# Altium PCB wifi_board_v2.PcbDoc
Units mil, origin at the board's own origin, x right, y up, seen from the top; angles counter-clockwise.
Board outline 1135 x 2672.07 mil, 4 copper layers (Top Layer, GND, 3v3, Bottom Layer), stack 23.756 mil thick; 54 components, 49 nets, 266 pads, 41 vias.
Unrouted connection lines stored in the file: 2.
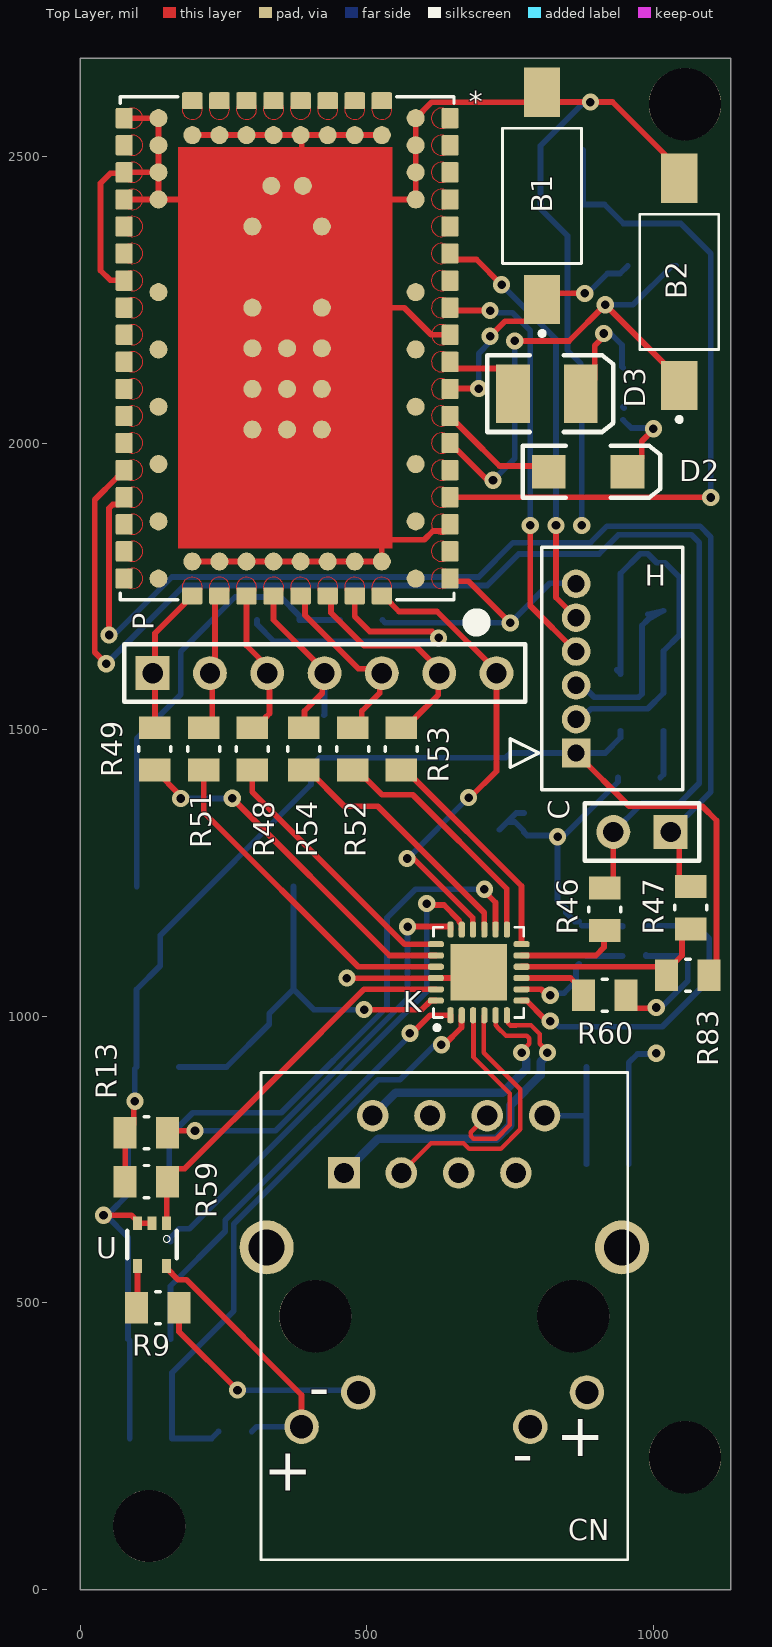
[diagram p0: Top Layer view]
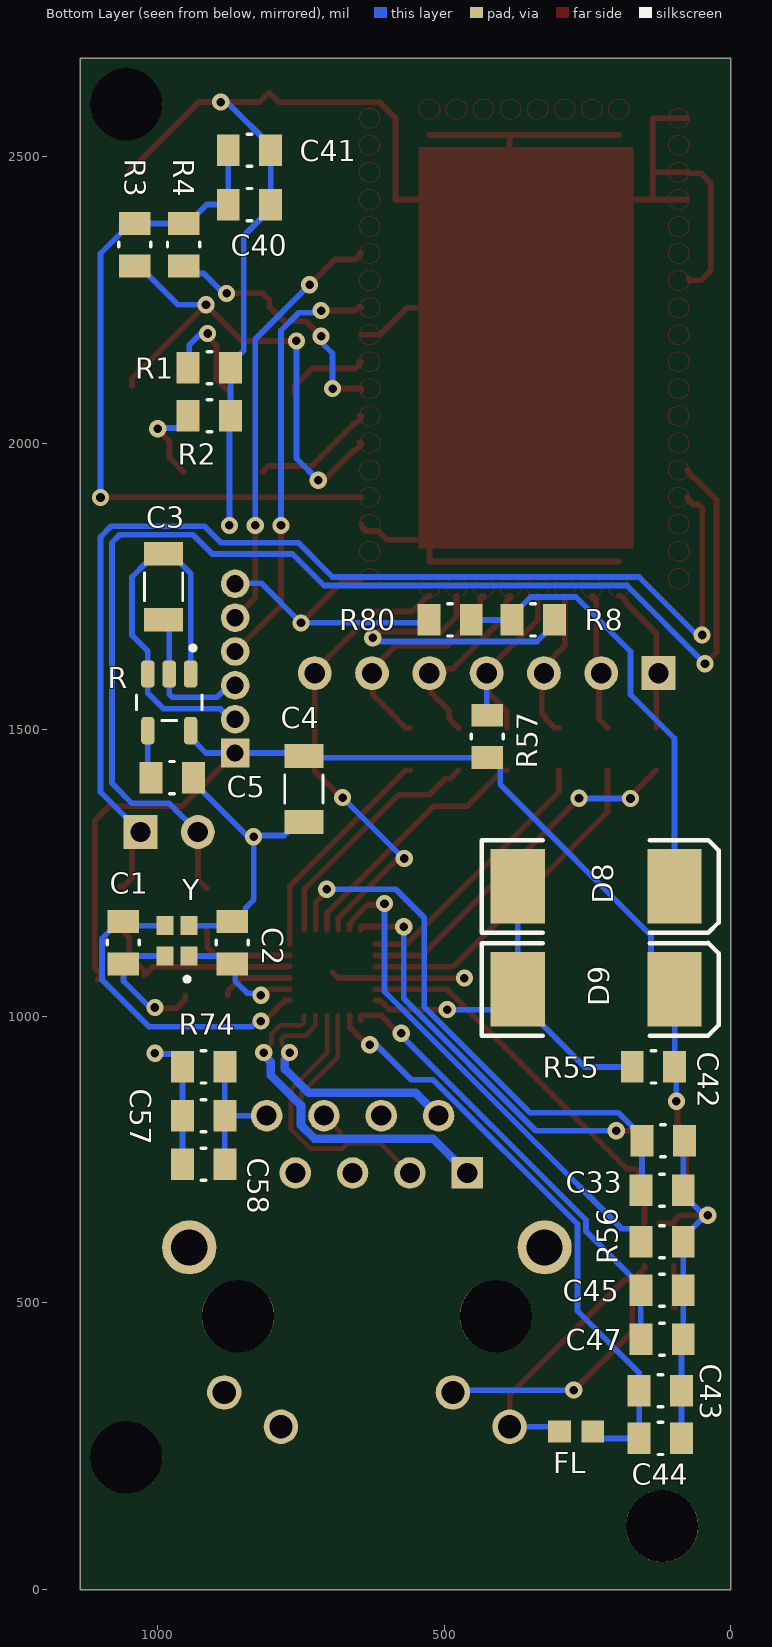
[diagram p1: Bottom Layer view, seen from below]
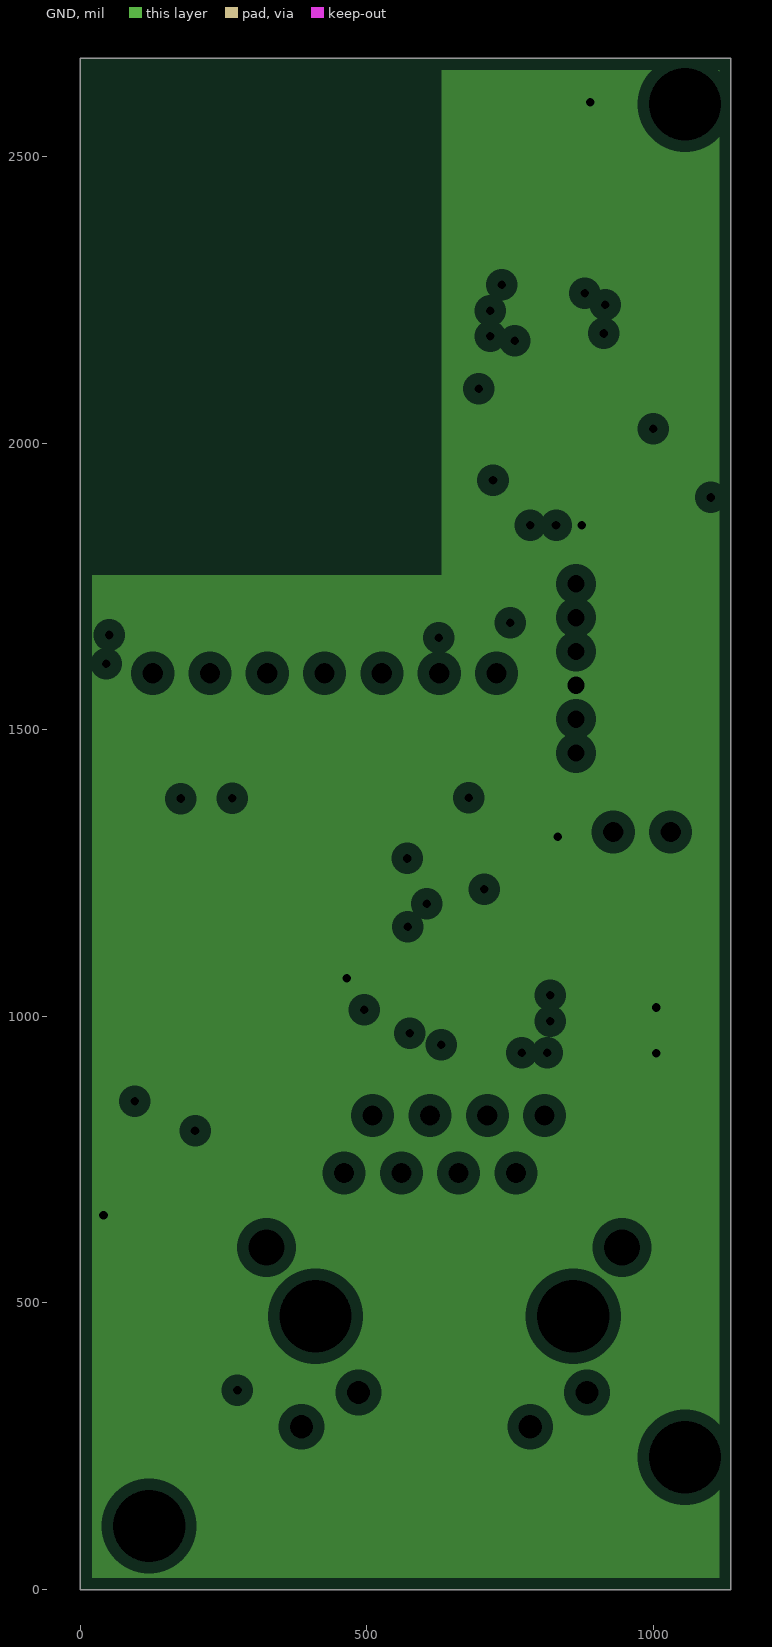
[diagram p2: GND, clearances drawn from the general rule]
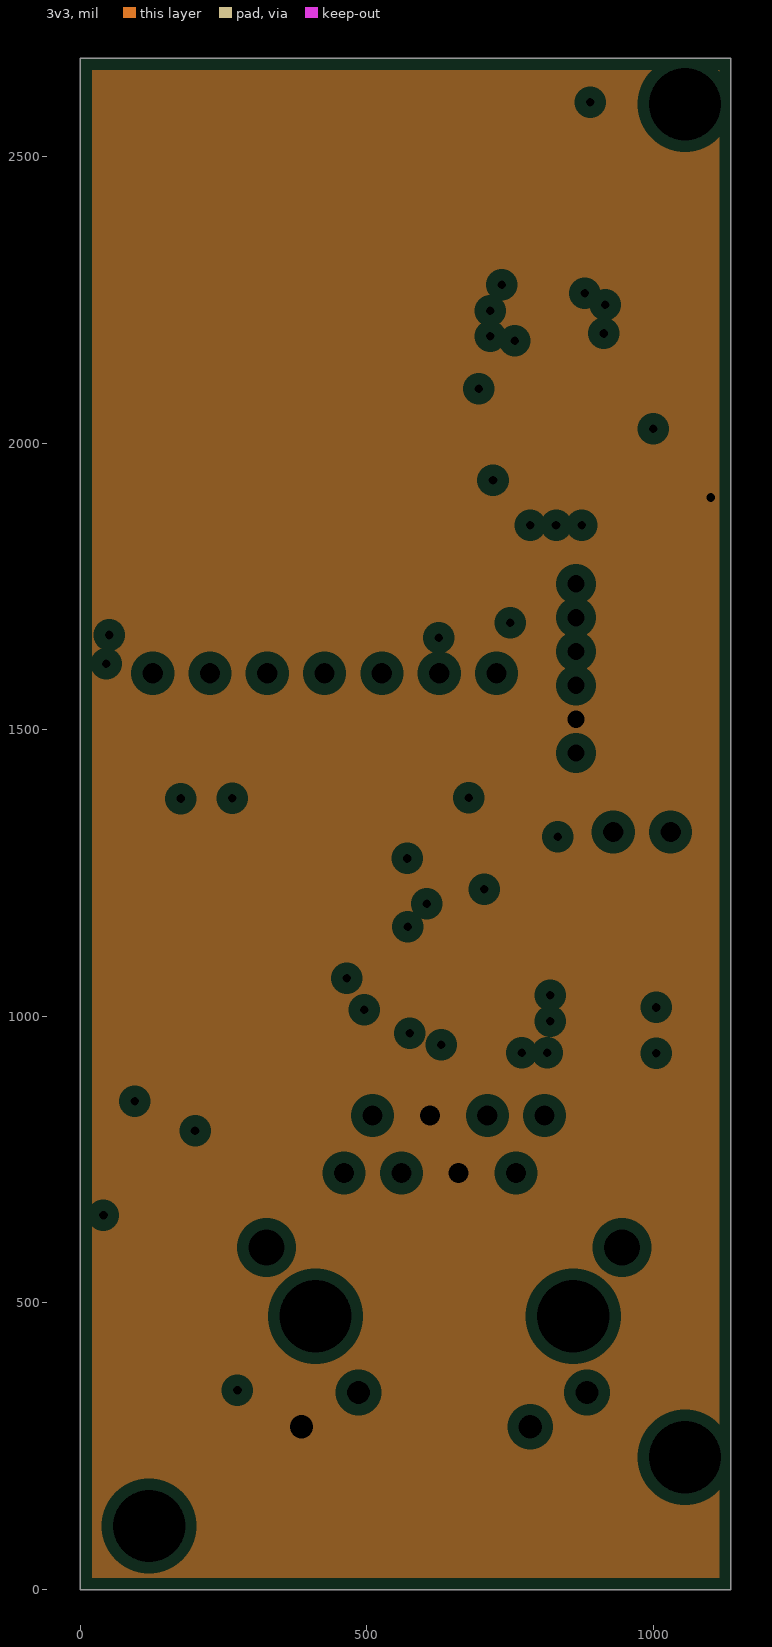
[diagram p3: 3v3, clearances drawn from the general rule]

## Layer stack, top to bottom
Top Solder: solder mask 0.4, Solder Resist, Dk 3.5
Top Layer: signal copper 1.4
Dielectric 2: prepreg 2.8, PP-006, Dk 4.1
GND: plane copper 1.378, net GND
Dielectric 1: dielectric 12.6, FR-4, Dk 4.8
3v3: plane copper 1.378, net 3v3
Dielectric 3: prepreg 2.8, PP-006, Dk 4.1
Bottom Layer: signal copper 1.4
Bottom Solder: solder mask 0.4, Solder Resist, Dk 3.5

## Board outline
0,2671.21 0,-0.86 1135,-0.86 1135,2671.21

## Design rules (kind name [scope] priority, off if disabled: settings)
Clearance [All] p1: gap=5 ignorepadtopadclearanceinfootprint=FALSE // Default=10mil
DiffPairsRouting [All] p1: maxlimit=10 minlimit=10 mostfreqgap=10 toplayer_minwidth=8 toplayer_maxwidth=15 toplayer_prefwidth=15 bottomlayer_minwidth=10 bottomlayer_maxwidth=15 bottomlayer_prefwidth=15 maxuncoupledlength=500 // DefaultMinWidth=15mil
HoleSize [All] p1: absolutevalues=TRUE maxlimit=150 minlimit=1 maxpercent=80.000 minpercent=20.000 // MaximumDefault=100mil
MinimumSolderMaskSliver [All] p1: minsoldermaskwidth=1 // Default=10mil
PlaneClearance [All] p1: clearance=20
PlaneConnect [All] p1: planeconnectstyle=Relief reliefexpansion=20 reliefentries=4 reliefconductorwidth=10 reliefairgap=10
PolygonConnect [All] p1: connectstyle=Relief reliefconductorwidth=10 reliefentries=4 polygonreliefangle="90 Angle" airgapwidth=10
RoutingVias [All] p1: holewidth=28 width=50 viastyle="Through Hole" minholewidth=28 minwidth=50 maxholewidth=28 maxwidth=50
SilkToSolderMaskClearance [IsPad] p1: minsilkscreentomaskgap=4 clearancetoexposedcopper=TRUE // Default=10mil
SolderMaskExpansion [All] p1: expansion=4 istentingtop=FALSE
Width [All] p1: maxlimit=10 minlimit=8 preferedwidth=10 minimp=50.000000 maximp=50.000000 favimp=50.000000 // MinWidthDefault=10mil
24 further rules are at their usual default settings.

## Classes and differential pairs
differential pair PHY_TX: +PHY_TX_P -PHY_TX_N
differential pair PHY_RX: +PHY_RX_P -PHY_RX_N

## Components (designator, comment, footprint, x,y, rotation, side; value= is the part's Value field where it differs from the comment)
* "ODIN-W262" ODIN-W262 360.63,2165.35 r90 top
B1 "push button" TECO-FSMSM 805.68,2431.21 r90 top
B2 "push button" TECO-FSMSM 1045,2281.21 r90 top
C "Header 2" HDR1X2 1030,1321.21 r180 top
C1 "22uF 10V" 0805 1060,1128.21 r270 bottom value=22uF
C2 "22uF 10V" 0805 870,1128.21 r90 bottom value=22uF
C3 "10UF 25V" 1206 990,1749.24 r270 bottom value=10uF
C4 "10UF 25V" 1206 745,1396.21 r270 bottom value=10uF
C5 "10nF 50V" 0805 975,1416.21 r180 bottom value=10nF
C33 "2.2uF 16V" 0805 120,696.21 r0 bottom value=2.2uF
C40 "100nF 50V" 0805 840,2416.21 r0 bottom value=100nF
C41 "100nF 50V" 0805 840,2511.21 r0 bottom value=100nF
C42 "100nF 50V" 0805 118,782.15 r0 bottom value=100nF
C43 "2.2uF 16V" 0805 123,346.18 r0 bottom value=2.2uF
C44 "100nF 50V" 0805 123,262.9 r0 bottom value=100nF
C45 "100nF 50V" 0805 120,521.21 r0 bottom value=100nF
C47 "100nF 50V" 0805 120,436.21 r0 bottom value=100nF
C57 "100nF 50V" 0805 920,826.21 r0 bottom value=100nF
C58 "100nF 50V" 0805 920,741.21 r0 bottom value=100nF
CN "CN J00-0045NL" "RJ45 J00-0045NL" 635,476.21 r180 top
D2 "LED2" 3.2X1.6X1.1 886.1,1950 r0 top
D3 "LED3" 3.5X2.8X1.9 814.06,2086.21 r0 top
D8 "Diode" SMC 235,1226.21 r180 bottom
D9 "Diode" SMC 235,1046.71 r180 bottom
FL "BLM18PG300SN1D" BEADC1608X95N 270,275 r180 bottom
H "S6B-ZR(LF)(SN)" S6B-ZR_JST 865,1459.05 r90 top
K "KSZ8081RNAIA-TR" QFN50P400X400X90-25N 695,1076.21 r90 top
P "Header 7" HDR1X7 126.07,1598.45 r0 top
R "LP2992IM5-1.8" SOT95P280X145-5N 980,1547.5 r270 bottom
R1 "270" 0805 910,2131.21 r0 bottom
R2 "270" 0805 910,2047.94 r0 bottom
R3 "1k" 0805 1040,2346.21 r90 bottom
R4 "1k" 0805 955,2346.21 r90 bottom
R8 "JUMPER" 0805 345,1691.21 r180 bottom value=0
R9 "120" 0805 135,491.21 r180 top
R13 "1k" 0805 115,796.21 r180 top
R46 "10.0" 0805 915,1186.21 r90 top
R47 "10.0" 0805 1065,1189.21 r90 top
R48 "10.0" 0805 300,1466.21 r270 top
R49 "10.0" 0805 130,1466.21 r270 top
R51 "10.0" 0805 215,1466.21 r270 top
R52 "10.0" 0805 475,1466.21 r90 top
R53 "10.0" 0805 560,1466.21 r90 top
R54 "10.0" 0805 390,1466.21 r90 top
R55 "1k" 0805 135,911.21 r180 bottom
R56 "1k" 0805 120,606.21 r180 bottom
R57 "1k" 0805 425,1488 r90 bottom
R59 "1k" 0805 115,711.21 r0 top
R60 "6.8k" 0805 915,1036.21 r180 top
R74 "16m" 0805 920,911.21 r180 bottom
R80 "JUMPER" 0805 490,1691.21 r0 bottom value=0
R83 "4.7k" 0805 1060,1071.21 r180 top
U "NC7SZ125" SC70-5 125,601.21 r180 top
Y "ECS-250-10-37-JTN-TR" XTAL_ECS-250-10-37-JTN-TR 966.51,1131.21 r90 bottom

## Footprints (in the part's own frame and the unit in brackets; to place one, negate y for a bottom-side part, rotate by r counter-clockwise, add the part's x,y. Pads: shape width x height; smd on the part's side, far side on the other; paste and mask are expansions set on the pad)
3.2X1.6X1.1 [mm]
  rect 1.5x1.5 smd: 1(-1.75,0) 2(1.75,0)
  silkscreen extent -2.9,-1.15 3.2,1.15
3.5X2.8X1.9 [mm] "SM LED; 2 C-Bend Leads; Body 3.5 x 2.8 x 1.9 mm, inc leads (LxWxH typ)"
  rect 1.5x2.6 smd: 1(-1.5,0) 2(1.5,0)
  silkscreen extent -2.65,-1.7 2.95,1.7
0805 [mil]
  rect 40x55 smd: 1(-37,0) 2(37,0)
  silkscreen extent -4,-28 4,28
1206 [mm]
  rect 1.05x1.72 smd: 1(-1.46,0) 2(1.46,0)
  silkscreen extent -0.62,-0.85 0.62,0.85
BEADC1608X95N [mm]
  rect 1x0.97 smd: 1(-0.735,0) 2(0.735,0)
HDR1X2 [mm] "Connector; Header; 2 Position"
  rect 1.5x1.5 hole 0.9: 1(0,0)
  round 1.5 hole 0.9: 2(2.54,0)
  silkscreen extent -1.27,-1.27 3.81,1.27
HDR1X7 [mm] "Connector; Header; 7 Position"
  rect 1.5x1.5 hole 0.9: 1(0,0)
  round 1.5 hole 0.9: 2(2.54,0) 3(5.08,0) 4(7.62,0) 5(10.16,0) 6(12.7,0) 7(15.24,0)
  silkscreen extent -1.27,-1.27 16.51,1.27
ODIN-W262 [mm]
  round 0.8 smd: 1(6.6,-5.7) 2(7.8,-5.7) 3(9,-5.7) 4(10.2,-5.7) 5(9.45,-4.2) 6(9.45,-3) 7(9.45,-1.8) 8(9.45,-0.6) 9(9.45,0.6) 10(9.45,1.8) 11(9.45,3) 12(9.45,4.2) 13(10.2,5.7) 14(9,5.7) 15(7.8,5.7) 16(6.6,5.7) 17(-9.45,4.2) 18(-9.45,3) 19(-9.45,1.8) 20(-9.45,0.6) 21(-9.45,-0.6) 22(-9.45,-1.8) 23(-9.45,-3) 24(-9.45,-4.2) 25(-3.6,-1.54) 26(-1.8,-1.54) 27(0,-1.54) 28(1.8,-1.54) 29(5.4,-1.54) 30(7.2,-0.7) 31(-3.6,0) 32(-1.8,0) 33(0,0) 34(-3.6,1.54) 35(-1.8,1.54) 36(0,1.54) 37(1.8,1.54) 38(5.4,1.54) 39(7.2,0.7) TP1(2.49,-5.7) TP2(2.49,5.7) TP3(-0.05,-5.7) TP4(-0.05,5.7) TP5(-2.59,-5.7) TP6(-2.59,5.7) TP7(-5.13,-5.7) TP8(-5.13,5.7) TP9(-7.67,-5.7) TP10(-7.67,5.7) TP11(-10.21,-5.7) TP12(-10.21,5.7)
  rrect15% 0.9x0.75 smd paste-1 mask+0: A1(-10.2,-7.225) A2(-9,-7.225) A3(-7.8,-7.225) A4(-6.6,-7.225) A5(-5.4,-7.225) A6(-4.2,-7.225) A7(-3,-7.225) A8(-1.8,-7.225) A9(-0.6,-7.225) A10(0.6,-7.225) A11(1.8,-7.225) A12(3,-7.225) A13(4.2,-7.225) A14(5.4,-7.225) A15(6.6,-7.225) A16(7.8,-7.225) A17(9,-7.225) A18(10.2,-7.225) C1(10.2,7.225) C2(9,7.225) C3(7.8,7.225) C4(6.6,7.225) C5(5.4,7.225) C6(4.2,7.225) C7(3,7.225) C8(1.8,7.225) C9(0.6,7.225) C10(-0.6,7.225) C11(-1.8,7.225) C12(-3,7.225) C13(-4.2,7.225) C14(-5.4,7.225) C15(-6.6,7.225) C16(-7.8,7.225) C17(-9,7.225) C18(-10.2,7.225)
  rrect15% 0.75x0.9 smd paste-1 mask+0: B1(10.975,-4.2) B2(10.975,-3) B3(10.975,-1.8) B4(10.975,-0.6) B5(10.975,0.6) B6(10.975,1.8) B7(10.975,3) B8(10.975,4.2) D1(-10.975,4.2) D2(-10.975,3) D3(-10.975,1.8) D4(-10.975,0.6) D5(-10.975,-0.6) D6(-10.975,-1.8) D7(-10.975,-3) D8(-10.975,-4.2)
  Top Layer circle w0: c10.2,6.85 r0.45
  Top Layer circle w0: c4.2,-6.85 r0.45
  Top Layer circle w0: c3,-6.85 r0.45
  Top Layer circle w0: c5.4,-6.85 r0.45
  Top Layer circle w0: c6.6,-6.85 r0.45
  Top Layer circle w0: c7.8,-6.85 r0.45
  Top Layer circle w0: c9,-6.85 r0.45
  Top Layer circle w0: c10.2,-6.85 r0.45
  Top Layer circle w0: c-9,-6.85 r0.45
  Top Layer circle w0: c-5.4,-6.85 r0.45
  Top Layer circle w0: c1.8,6.85 r0.45
  Top Layer circle w0: c0.6,6.85 r0.45
  Top Layer circle w0: c-0.6,6.85 r0.45
  Top Layer circle w0: c-1.8,6.85 r0.45
  Top Layer circle w0: c-3,6.85 r0.45
  Top Layer circle w0: c-4.2,6.85 r0.45
  Top Layer circle w0: c-7.8,6.85 r0.45
  Top Layer circle w0: c-9,6.85 r0.45
  Top Layer circle w0: c-10.2,6.85 r0.45
  Top Layer circle w0: c9,6.85 r0.45
  Top Layer circle w0: c5.4,6.85 r0.45
  Top Layer circle w0: c4.2,6.85 r0.45
  Top Layer circle w0: c10.6,-4.2 r0.45
  Top Layer circle w0: c10.6,-3 r0.45
  Top Layer circle w0: c10.6,-1.8 r0.45
  Top Layer circle w0: c10.6,-0.6 r0.45
  Top Layer circle w0: c10.6,0.6 r0.45
  Top Layer circle w0: c10.6,1.8 r0.45
  Top Layer circle w0: c10.6,3 r0.45
  Top Layer circle w0: c10.6,4.2 r0.45
  Top Layer lines w0: -5.414,7.3 ccw(c-5.4,6.85) -5.486,7.292 ccw(c-5.4,6.85) -5.667,6.488 ccw(c-5.4,6.85) -5.4,6.4 ccw(c-5.4,6.85) -5.414,7.3 ; 2.968,7.299 cw(c3,6.85) 3.07,7.295 cw(c3,6.85) 3.131,7.281 cw(c3,6.85) 3,6.4 cw(c3,6.85) 2.968,7.299 ; 7.756,7.298 ccw(c7.8,6.85) 7.669,7.281 ccw(c7.8,6.85) 7.8,6.4 ccw(c7.8,6.85) 7.756,7.298 ; 6.53,7.295 cw(c6.6,6.85) 6.6,6.4 cw(c6.6,6.85) 6.53,7.295 ; -6.731,7.281 cw(c-6.6,6.85) -6.6,6.4 cw(c-6.6,6.85) -6.731,7.281 ; -11.031,4.331 cw(c-10.6,4.2) -10.6,3.75 cw(c-10.6,4.2) -11.045,4.13 cw(c-10.6,4.2) -11.05,4.2 cw(c-10.6,4.2) -11.05,4.207 cw(c-10.6,4.2) -11.047,4.251 cw(c-10.6,4.2) -11.045,4.27 cw(c-10.6,4.2) -11.042,4.286 cw(c-10.6,4.2) -11.031,4.331 ; -11.037,3.107 ccw(c-10.6,3) -11.045,3.07 ccw(c-10.6,3) -11.05,3 ccw(c-10.6,3) -10.6,2.55 ccw(c-10.6,3) -11.037,3.107 ; -11.05,1.8 ccw(c-10.6,1.8) -10.6,1.35 ccw(c-10.6,1.8) -11.05,1.8 ; -11.047,0.651 ccw(c-10.6,0.6) -11.05,0.6 ccw(c-10.6,0.6) -11.031,0.469 ccw(c-10.6,0.6) -10.6,0.15 ccw(c-10.6,0.6) -11.047,0.651 ; -11.05,-0.6 cw(c-10.6,-0.6) -10.6,-1.05 cw(c-10.6,-0.6) -11.031,-0.731 cw(c-10.6,-0.6) -11.05,-0.619 cw(c-10.6,-0.6) -11.05,-0.6 ; -11.048,-1.762 ccw(c-10.6,-1.8) -11.05,-1.8 ccw(c-10.6,-1.8) -11.045,-1.87 ccw(c-10.6,-1.8) -11.039,-1.901 ccw(c-10.6,-1.8) -11.031,-1.931 ccw(c-10.6,-1.8) -10.6,-2.25 ccw(c-10.6,-1.8) -11.048,-1.762 ; -11.031,-2.869 cw(c-10.6,-3) -10.6,-3.45 cw(c-10.6,-3) -11.031,-3.131 cw(c-10.6,-3) -11.034,-3.118 cw(c-10.6,-3) -11.042,-3.086 cw(c-10.6,-3) -11.043,-3.076 cw(c-10.6,-3) -11.049,-3.032 cw(c-10.6,-3) -11.05,-3 cw(c-10.6,-3) -11.031,-2.869 ; -11.05,-4.2 cw(c-10.6,-4.2) -10.6,-4.65 cw(c-10.6,-4.2) -10.975,-4.449 cw(c-10.6,-4.2) -11.031,-4.331 cw(c-10.6,-4.2) -11.05,-4.2 ; 0.6,-6.4 cw(c0.6,-6.85) 0.6,-7.3 cw(c0.6,-6.85) 0.6,-6.4 ; -8.067,-6.488 ccw(c-7.8,-6.85) -8.098,-6.513 ccw(c-7.8,-6.85) -7.8,-7.3 ccw(c-7.8,-6.85) -8.067,-6.488 ; -10.069,-7.281 cw(c-10.2,-6.85) -10.114,-7.292 cw(c-10.2,-6.85) -10.2,-7.3 cw(c-10.2,-6.85) -10.27,-7.295 cw(c-10.2,-6.85) -10.069,-7.281 ; -3.131,-7.281 ccw(c-3,-6.85) -3,-7.3 ccw(c-3,-6.85) -3.131,-7.281 ; -0.514,-7.292 ccw(c-0.6,-6.85) -0.67,-7.295 ccw(c-0.6,-6.85) -0.6,-7.3 ccw(c-0.6,-6.85) -0.514,-7.292 ; -6.67,-7.295 cw(c-6.6,-6.85) -6.6,-7.3 cw(c-6.6,-6.85) -6.67,-7.295 ; -1.87,-7.295 ccw(c-1.8,-6.85) -1.8,-7.3 ccw(c-1.8,-6.85) -1.787,-7.3 ccw(c-1.8,-6.85) -1.87,-7.295 ; 1.87,-7.295 cw(c1.8,-6.85) 1.849,-7.297 cw(c1.8,-6.85) 1.8,-7.3 cw(c1.8,-6.85) 1.87,-7.295 ; -4.169,-7.299 cw(c-4.2,-6.85) -4.2,-7.3 cw(c-4.2,-6.85) -4.169,-7.299
  silkscreen extent -12.4,-8.65 11.15,7.4, body extent -11.15,-7.4 11.15,7.4, height 4.8
QFN50P400X400X90-25N [mm]
  rrect70% 0.71x0.27 smd: 1(-1.9,1.25) 2(-1.9,0.75) 3(-1.9,0.25) 4(-1.9,-0.25) 5(-1.9,-0.75) 6(-1.9,-1.25) 13(1.9,-1.25) 14(1.9,-0.75) 15(1.9,-0.25) 16(1.9,0.25) 17(1.9,0.75) 18(1.9,1.25)
  rrect70% 0.27x0.71 smd: 7(-1.25,-1.9) 8(-0.75,-1.9) 9(-0.25,-1.9) 10(0.25,-1.9) 11(0.75,-1.9) 12(1.25,-1.9) 19(1.25,1.9) 20(0.75,1.9) 21(0.25,1.9) 22(-0.25,1.9) 23(-0.75,1.9) 24(-1.25,1.9)
  rect 2.5x2.5 smd paste-2: 25(0,0)
  silkscreen extent -2.55,-2 2,2
"RJ45 J00-0045NL" [mm]
  rect 1.398x1.398 hole 0.89: 1(4.445,-6.35)
  round 1.398 hole 0.89: 2(3.175,-8.89) 3(1.905,-6.35) 4(0.635,-8.89) 5(-0.635,-6.35) 6(-1.905,-8.89) 7(-3.175,-6.35) 8(-4.445,-8.89)
  round 1.53 hole 1.02: 9(6.325,4.9) 10(3.81,3.38) 11(-3.81,4.9) 12(-6.325,3.38)
  round 3.2 hole 3.2 unplated: None(-5.715,0) None(5.715,0)
  round 2.4 hole 1.6: S1(-7.875,-3.05) S2(7.875,-3.05)
  silkscreen extent -8.13,-10.8 8.13,10.8
S6B-ZR_JST [mil]
  rect 50x50 hole 30 mask+0: 1(0,0)
  round 50 hole 30 mask+0: 2(59.06,0) 3(118.11,0) 4(177.17,0) 5(236.22,0) 6(295.28,0)
  silkscreen extent -64,-186 359,115, body extent 0,0 10,10, height 10
SC70-5 [mm]
  rect 0.4x0.6 smd: 1(-0.65,-0.95) 2(0,-0.95) 3(0.65,-0.95) 4(0.65,0.95) 5(-0.65,0.95)
  silkscreen extent -1.1,-0.6 1.1,0.6
SMC [mm] "DO-214-AB/SMC; 2 C-Bend Leads; Body 7.9 x 5.9 mm, inc. leads (LxW)"
  rect 2.4x3.3 smd: 1(-3.475,0) 2(3.475,0)
  silkscreen extent -5.07,-2.05 5.43,2.05
SOT95P280X145-5N [mm]
  rrect50% 1.21x0.59 smd: 1(-1.255,0.95) 2(-1.255,0) 3(-1.255,-0.95) 4(1.255,-0.95) 5(1.255,0.95)
  silkscreen extent -2.51,-1.45 0.8,1.45
TECO-FSMSM [mm]
  rect 2.19x1.6 smd: 1(-4.59,0) 2(4.59,0)
  silkscreen extent -6.2,-1.75 3,1.75
XTAL_ECS-250-10-37-JTN-TR [mm]
  rect 0.85x0.75 smd: 1(-0.675,-0.525) 2(0.675,-0.525) 3(0.675,0.525) 4(-0.675,0.525)
  silkscreen extent -1.8,-0.55 -1.6,-0.35

## Part data
B1 B2: library part Teco-FSMSM
C: "Header, 2-Pin", LatestRevisionDate=17-Jul-2002, LatestRevisionNote="Re-released for DXP Platform.", Publisher="Altium Limited"
C1 C2: library part "CAP 22uF 10V", "CAP CER 2.2UF 10V X5R 0805", Operating Temperature="-55°C ~ 85°C", Package=0805, Rating=10V, Temperature Coefficient=X5R, Tolerance=20%
C3 C4: library part "CAP 10uF 25V", "CAP CER 10UF 25V X5R 1206", Operating Temperature="-55°C ~ 85°C", Package=1206, Rating=25V, Temperature Coefficient=X5R, Tolerance=10%
C5: library part "CAP 10nF 50V", "CAP CER 10000PF 50V X7R 0805", Operating Temperature="-55°C ~ 125°C", Package=0805, Rating=50V, Temperature Coefficient=X7R, Tolerance=10%
C33 C43: library part "CAP 2.2uF 16V", "CAP CER 2.2UF 16V X7R 0805", Operating Temperature="-55°C ~ 125°C", Package=0805, Rating=16V, Temperature Coefficient=X7R, Tolerance=10%
C40 C41 C42 C44 C45 C47 C57 C58: library part "CAP 100nF 50V", "CAP CER 0.1UF 50V X7R 0805", Package=0805, Rating=50V, Tolerance=10%
CN: library part "CN MAGJACK", "CN MAGJACK 1PORT 100 BASE-TX", Package=None, Supplier Part Number 1=673-J00-0045NL, Digikey=553-1619-5-ND, Digikey Link=https://www.digikey.com/product-detail/en/pulse-electronics-network/J00-0045NL/553-1619-5-ND/1036860?utm_source=snapeda&utm_medium=aggregator&utm_campaign=symbol, MF="Pulse Electronics", MP=J00-0045NL, SnapEDA_Link=https://www.snapeda.com/parts/J00-0045NL/Pulse%20Electronics%20Network/view-part/87956/?ref=snap, Supplier 1=Mouser
D2: library part "LED RED SMD", "Typical RED, GREEN, YELLOW, AMBER GaAs LED", Color=Red, Current - Test=20mA, Lens Color=Colorless, Package=1206, Voltage - Forward (Vf) (Typ)=1.7V, Lens Transparency=Clear
D3: "Typical BLUE SiC LED", DatasheetVersion=16-Apr-2002, LatestRevisionDate=17-Dec-2003, LatestRevisionNote="PCB Footprint replaced.", PackageDescription="SM LED; 2 C-Bend Leads; Body 3.5 x 2.8 x 1.9 mm, inc leads (LxWxH typ)", PackageReference=3.5X2.8X1.9, PackageVersion=16-Apr-2002, Published=8-Jun-2000, Publisher="Altium Limited"
D8 D9: "Default Diode", Code_JEDEC=DO-214-AB, LatestRevisionDate=17-Jul-2002, LatestRevisionNote="Re-released for DXP Platform.", PackageDescription="DO-214-AB/SMC; 2 C-Bend Leads; Body 7.9 x 5.9 mm, inc. leads (LxW)", PackageReference=SMC, PackageVersion=Sep-1996, Published=8-Jun-2000, Publisher="Altium Limited"
FL: "30 Ohms @ 100MHz 1 Power Line Ferrite Bead 0603 _1608 Metric_ 1A 50mOhm", Package="1608 Murata", Availability=Unavailable, MF=Murata, MP=BLM18PG300SN1D, Price=None, SnapEDA_Link=https://www.snapeda.com/parts/BLM18PG300SN1D/Murata/view-part/270173/?ref=snap
H: "No Description Available", Built_By=EMA_UL_Team, Copyright="Copyright (C) 2018 Accelerated Designs. All rights reserved", Manufacturer_Part_Number=S6B-ZR(LF)(SN), RefDes=RefDes, SourceLibrary=JST_2017-04-18, Type=DEV, Vendor=JST
K: "1/1 Transceiver Full RMII 24-QFN _4x4_", Package="QFN-24 Microchip", Availability=Unavailable, MF=Microchip, MP=KSZ8081RNAIA-TR, Price=None, SnapEDA_Link=https://www.snapeda.com/parts/KSZ8081RNAIA-TR/Microchip/view-part/482545/?ref=snap
P: "Header, 7-Pin", LatestRevisionDate=17-Jul-2002, LatestRevisionNote="Re-released for DXP Platform.", Publisher="Altium Limited"
R: Package=None, Availability=Unavailable, MP=LP2992IM5-1.8/NOPB, Price=None
R1 R2: library part "RES 270 1/8W", "RES SMD 270 OHM 5% 1/8W 0805", Package=0805, Power (Watts)=0.125W, Tolerance=5%
R3 R4 R13 R55 R56 R57 R59: library part "RES 1k 1/8W", "RES SMD 1K OHM 5% 1/8W 0805", Package=0805, Power (Watts)=0.125W, Tolerance=5%
R8 R80: library part "RES 0 JUMPER", "RES SMD 0 OHM JUMPER GENERIC 0805", Package=0805
R9: library part "RES 120.0 1/8W", "RES SMD 120 OHM 5% 1/8W 0805", Package=0805, Power (Watts)=0.125W, Tolerance=5%
R46 R47 R48 R49 R51 R52 R53 R54: library part "RES 10.0 1/8W - 5%", "RES SMD 10.0 OHM 5% 1/8W 0805", Package=0805, Power (Watts)=0.125W, Tolerance=5%
R60: library part "RES 6.8k 1/8W", "RES SMD 6.8K OHM 5% 1/8W 0805", Package=0805, Power (Watts)=0.125W, Tolerance=5%
R74: library part "RES 16m 1/2W", "RES SMD 0.016 OHM 1% 1/2W 0805 Thick Film", Case Code (Imperial)=0805, Case Code (Metric)=2012, Manufacturer=Panasonic, Manufacturer Part Number=ERJ-6BWFR016V, Max Operating Temperature=155°C, Max Power Dissipation=500mW, Min Operating Temperature=-55°C, Package Quantity=1, Resistance=16mR, Supplier Part Number 1=P.016AQCT-ND, Temperature Coefficient=200ppm/°C, Tolerance=1%, Case/Package=0805, Category="Chip SMD Resistors", ComponentLink1Description=https://datasheet.ciiva.com/11808/0900766b8126441d-11808690.pdf?src-supplier=RSComponents, ComponentLink1URL=https://datasheet.ciiva.com/11808/0900766b8126441d-11808690.pdf?src-supplier=RSComponents, ComponentLink2Description=https://datasheet.ciiva.com/2452/aoa0000ce3-2452594.pdf?src-supplier=Digi-Key, ComponentLink2URL=https://datasheet.ciiva.com/2452/aoa0000ce3-2452594.pdf?src-supplier=Digi-Key, ComponentLink3Description=https://datasheet.ciiva.com/2452/aoa0000ce3-2452592.pdf?src-supplier=Digi-Key, ComponentLink3URL=https://datasheet.ciiva.com/2452/aoa0000ce3-2452592.pdf?src-supplier=Digi-Key, ComponentLink4Description=https://datasheet.ciiva.com/2452/aoa0000ce3-2452593.pdf?src-supplier=Digi-Key, ComponentLink4URL=https://datasheet.ciiva.com/2452/aoa0000ce3-2452593.pdf?src-supplier=Digi-Key, ComponentLink5Description=https://datasheet.ciiva.com/9192/aoa0000ce3-9192761.pdf?src-supplier=Avnet, ComponentLink5URL=https://datasheet.ciiva.com/9192/aoa0000ce3-9192761.pdf?src-supplier=Avnet, ComponentLink6Description=https://datasheet.ciiva.com/17211/aoa0000ce3-17211370.pdf?src-supplier=Avnet+Europe, ComponentLink6URL=https://datasheet.ciiva.com/17211/aoa0000ce3-17211370.pdf?src-supplier=Avnet+Europe, Composition="Thick Film", Contact Plating=Tin, Depth=1.25mm, Features="Automotive AEC-Q200", Height=0.028inch, Lead Free="Lead Free", Length=2mm, Military Standard=Not, Mount="Surface Mount", Number of Pins=2, Number of Terminations=2, Packaging="Tape and Reel", Power Rating=500mW, Pricing 1="1=0.65000, 10=0.53800, 100=0.36140, 1000=0.21148, 2500=0.20917 (USD)", Radiation Hardening=No, RoHS=Yes, Stock 1=4585, Supplier 1=Digi-Key, Termination=SMD/SMT, Width=0.049inch
R83: library part "RES 4.7k 1/8W - 5%", "RES SMD 4.7k OHM 5% 1/8W 0805", Package=0805, Power (Watts)=0.125W, Tolerance=5%
U: "Buffer, Non-Inverting 1 Element 1 Bit per Element 3-State Output SC-70-5", Package="SC-70 ON Semiconductor", Availability=Unavailable, MF="ON Semiconductor", MP=NC7SZ125, Price=None, SnapEDA_Link=https://www.snapeda.com/parts/NC7SZ125/ON%20Semiconductor/view-part/2686816/?ref=snap
Y: "SMD Crystal 2.0 x 1.6 x 0.45 mm ceramic package", Package=None, Availability=Unavailable, MP=ECS-250-10-37-JTN-TR, Price=None

## Free pads (board coordinates)
  round 125.98 hole 125.98 unplated: 6(120,110) 6(1055,230) 6(1055,2591.21)

## Via types
v1: diameter 30, hole 15, Top Layer to Bottom Layer, 41 vias

## Nets (pads, with @x,y where several pads share a name; then routed paths per layer and width w, separated by ;. In a path a pad name is that pad's centre, name@x,y a point inside that pad or via, vN(x,y) a via of type N, cw(c..) or ccw(c..) an arc to the next point about the centre after c; other vN are vias at no path point)
1v8: C4.1 D9.2 H.1 R13.2 R55.2 R57.1 R59.1 R83.1 R.5 | length 2012.7
  Top Layer w10: R59.1 R13.2 93,811.21 93,849.21 v1(95,851.21) ; H.1 957.83,1366.21 1085,1366.21 1110,1341.21 1110,1084.21 R83.1 R83.1@1105,1063.21
  Bottom Layer w10: v1(95,851.21) 95,908.21 R55.2 98,1046.53 139.16,1087.69 139.16,1140.84 402.5,1404.18 402.5,1436 417.5,1451 R57.1 742.31,1451 C4.1 750.35,1459.05 H.1 915.76,1459.05 942.6,1485.89 R.5
3v3: *.A4 C3.1 C40.2 C41.2 CN.4 CN.5 CN.9 FL.1 H.2 R3.2 R4.2 R.1 R.3 U.5 | length 2423.3
  Top Layer w10: U.5 150.59,559.87 170.54,539.93 184.93,539.93 385.98,338.87 CN.9 ; CN.4@605,821.21 CN.4 ; *.A4 648.03,1905.5 1099.5,1905.5 v1(1100,1905) ; H.2@864.33,1518.1 H.2
  Bottom Layer w10: FL.1 307.24,283.3 CN.9 ; H.2 872.75,1518.1 890.86,1536.21 990,1536.21 1017.4,1563.61 R.3 1017.4,1637.14 1045,1664.74 1045,1766.21 1020.16,1791.06 1005.67,1791.06 C3.1 976.81,1806.73 942.6,1772.51 R.1 942.6,1597.82 R.1@936.05,1604.37 ; C41.2 C40.2 914.5,2416.21 947.5,2383.21 R4.2 R3.2 1047.5,2383.21 1100,2330.71 v1(1100,1905)
BlueLED: *.A9 D3.1 | length 147.3
  Top Layer w10: *.A9 *.A9@648.03,2141.72 ; *.A9@647.82,2138.99 647.82,2137.02 654.84,2130 730.47,2130 761.89,2098.58 D3.1@761.89,2086.21
BYPASS: C5.1 R.4 | length 84.1
  Bottom Layer w10: C5.1 1017.4,1421.61 R.4
CRS_DV: K.15 R54.1 | length 447.1
  Top Layer w10: R54.1 397.5,1429.21 460.5,1366.21 518.79,1366.21 704.84,1180.16 K.15
Diode_2: D2.2 R2.2 | length 155.5
  Top Layer w10: D2.2 979.53,1974.53 979.53,2003.05 1000,2023.52 v1(1000,2025)
  Bottom Layer w10: R2.2@947,2040.44 961.22,2026.21 998.79,2026.21 v1(1000,2025) ; R2.2@947,2062.94 R2.2@948.72,2061.21
Diode_3: D3.2 R1.2 | length 190.7
  Top Layer w10: D3.2 897.64,2110.74 897.64,2170.33 913.11,2185.8 v1(913.11,2191.21)
  Bottom Layer w10: v1@925,2191.21 945,2171.21 945,2133.21 R1.2
ETH_CRSDV: *.D4 P.4 R54.2 R57.2 | length 359
  Top Layer w10: *.D4 337.01,1730.31 337.01,1691.44 430,1598.45 422.13,1590.58 422.13,1563.34 391.14,1532.36 391.14,1504.36 R54.2
  Bottom Layer w10: R57.2 426.07,1526.07 P.4
ETH_MDC: K.10 R47.1 R83.2 | length 368.7
  Top Layer w10: K.10@780.47,1086.69 780.16,1086.37 770.12,1086.37 K.10 1008.16,1086.06 R83.2 1023,1078.71 1050,1105.71 1050,1137.21 R47.1
ETH_MDIO: K.11 R46.1 | length 179.6
  Top Layer w10: K.11 899.53,1105.74 913.86,1120.07 913.86,1148.07 R46.1
ETH_REFCLK: *.D8 K.16 P.7 | length 828.4
  Top Layer w10: *.D8 528.94,1733.26 531.13,1731.07 555.98,1706.21 622.23,1706.21 P.7@730,1598.45 ; v1(570,1275) 581.21,1275 684.84,1171.37 684.84,1151.33 K.16 ; v1(677.5,1381.21) 680,1381.21 726.07,1427.28 P.7
  Bottom Layer w10: v1(570,1275) 571.29,1275 v1(677.5,1381.21)
ETH_TXD0: *.D1 P.1 R49.1 | length 258.8
  Top Layer w10: R49.1 130,1598.45 130,1667.98 182.56,1720.54 182.56,1723.5 190.13,1731.07 192.32,1733.26 *.D1
ETH_TXD1: *.D2 P.2 R51.1 | length 245.5
  Top Layer w10: R51.1 230,1518.21 230,1598.45 235,1603.45 235,1727.49 238.02,1730.5 240.77,1733.26 *.D2 ; *.D2@240.37,1728.15 *.D2@242.52,1730.31
ETH_TXEN: *.D3 P.3 R48.1 | length 263.5
  Top Layer w10: *.D3 289.76,1730.31 289.76,1646.45 330,1606.21 330,1528.21 322.5,1520.71 322.5,1518.21 307.5,1503.21 R48.1
GND: *.1 *.2 *.3 *.4 *.5 *.6 *.7 *.8 *.9 *.10 *.11 *.12 *.13 *.14 *.15 *.16 *.17 *.18 *.19 *.20 *.21 *.22 *.23 *.24 *.25 *.26 *.27 *.28 *.29 *.30 *.31 *.32 *.33 *.34 *.35 *.36 *.37 *.38 *.39 *.A3 *.A10 *.C1 *.C3 *.C4 *.C7 B1.2 B2.2 C1.2 C2.2 C3.2 C4.2 C5.2 C33.1 C40.1 C41.1 C42.1 C43.1 C44.1 C45.1 C47.1 C57.2 C58.2 H.3 K.22 K.25 R1.1 R2.1 R56.2 R60.1 R74.1 R.2 U.2 U.3 Y.2 Y.4 | length 7110.4
  Top Layer w10: v1@47.65,644.91 v1(40.25,652.31) 89.14,652.31 96.02,645.43 96.54,645.43 99.41,642.55 U.3 U.2 ; *.C7@73.44,2286.2 71.18,2283.94 52.28,2283.94 35,2301.21 35,2453.43 52.28,2470.7 73.31,2470.7 74.45,2470.7 *.C3 108.66,2472.43 *.15 ; *.C4 108.66,2425.19 *.16 ; *.C1 108.66,2566.92 *.13 *.14 *.15 ; *.17 *.18 *.19 *.20 *.21 *.22 *.23 *.24 525.98,1836.21 ; *.12 *.11 *.10 *.9 *.8 ; *.37 *.36 *.33 ; *.26@425,2091.21 421.73,2094.48 *.26 *.32 ; v1(465,1066.21) 620.04,1066.21 K.22 685.16,1066.37 K.25 ; *.5 *.6 *.7 *.8 ; *.A3 645.08,1856.29 635.31,1846.53 617.04,1846.53 615.31,1846.53 600,1831.21 530.98,1831.21 525.98,1836.21 ; *.A10 612.6,2188.97 612.24,2188.97 565,2236.21 *.28 ; v1@830,1315.77 v1(832.71,1313.06) ; R60.1 952,1028.71 967,1013.71 1003.71,1013.71 v1(1005,1015) ; B2.2@1040.71,2486.75 B2.2@1045,2482.46 ; B2.2@1050,2473.54 1023.5,2500.03 928.54,2595 v1(890,2595) 822.6,2595 B1.2 788.4,2594.64 612.76,2594.64 *.4 *.3 *.2 *.1 468.5,2425.19 *.29 ; *.16 *.15 ; *.16 252.76,2425.19 *.38 333.07,2411.02 *.39 *.30 ; *.32 *.33 ; *.32 *.35 *.34 *.31 *.25 525.98,1918.89 525.98,1836.21 ; *.33 *.27 *.28 ; *.8 386.22,2535.43 386.22,2450.78 *.30 ; *.30 388.19,2411.02 *.29 ; *.28 *.29
  Bottom Layer w10: v1@31.75,647.96 v1@36.1,652.31 ; C42.1@81,789.65 C42.1 83,780.15 C33.1 83,688.71 49.33,655.04 44.4,655.04 38.83,655.04 v1@36.1,652.31 ; C44.1 C43.1 86,433.21 C47.1 C45.1 R56.2 83,613.71 44.4,652.31 v1(40.25,652.31) v1@36.1,652.31 ; C4.2@731.27,1325 C4.2 ; C4.2@773.9,1354.4 760.67,1354.4 C4.2 ; H.3 875.82,1577.16 896.77,1556.21 974.14,1556.21 980,1562.07 R.2 980,1681.76 C3.2 1017.7,1707.43 C3.2@990,1701.21 ; C2.2 862.5,1165.21 847.5,1180.21 847.5,1187.71 832.71,1202.51 v1(832.71,1313.06) ; R2.1 875,2045.94 v1(875,1856.21) ; R2.1@873,2062.94 R1.1 873,2138.71 850,2161.71 850,2361.71 803,2408.71 C40.1 C41.1 803,2518.71 875.46,2591.17 886.17,2591.17 v1(890,2595) v1@879.29,2595 ; C2.2@875.43,1157.79 Y.2 Y.2@945.84,1155.82 ; C5.2 938,1408.71 842.35,1313.06 v1(832.71,1313.06) ; C58.2 C57.2 R74.1 957,918.71 972,933.71 1003.71,933.71 v1(1005,935) ; Y.4@987.18,1106.61 Y.4 C1.2@1046.57,1104.64 ; v1(1005,1015) 1013.79,1015 1060,1061.21 C1.2 ; C4.2 758.19,1338.73 773.86,1323.06 773.86,1320.86 779.72,1315 830.77,1315 v1(832.71,1313.06)
INTRP: K.18 R13.1 | length 721.3
  Top Layer w10: R13.1 155.79,800 v1(200,800) ; v1(570.91,1155.91) 571.21,1156.21 645.47,1156.21 645.79,1155.9 K.18
  Bottom Layer w10: v1(200,800) 340.36,800 570.91,1030.55 v1(570.91,1155.91)
INV_TO_RJ45: CN.10 R9.1 | length 398.9
  Top Layer w10: R9.1 172,449.21 v1(274.04,347.18)
  Bottom Layer w10: v1(274.04,347.18) 480.96,347.18 CN.10
JUMPERS: D8.2 R8.1 R80.1 | length 780.1
  Bottom Layer w10: D8.2 98.19,1484.4 175,1561.21 175,1636.21 270,1731.21 349.5,1731.21 382,1698.71 R8.1 R80.1
KSZ_RST_OUT: D8.1 D9.1 K.24 R55.1 | length 716
  Top Layer w10: v1(495,1011.21) 595.75,1011.21 611.22,1026.69 611.54,1027 K.24
  Bottom Layer w10: R55.1 255,911.21 329.57,985.78 329.57,1004.47 D9.1 ; D8.1 D9.1 ; v1(495,1011.21) 407.31,1011.21 D9.1
MAIN_RESET: *.A1 H.6 R80.2 | length 514.8
  Top Layer w10: *.A1@648.03,1763.77 *.A1 650.08,1758.77 677.44,1758.77 v1(750,1686.21)
  Bottom Layer w10: R80.2 532,1686.21 v1(750,1686.21) 819.06,1755.27 864.06,1755.27 H.6 ; H.6@877.88,1755.29 H.6@881.93,1759.35
Net*_D5: *.D5 P.5 R52.2 | length 339.2
  Top Layer w10: *.D5@384.25,1730.31 385.05,1730.31 386.84,1728.52 391.86,1723.5 391.86,1699.35 484.9,1606.32 522.13,1606.32 530,1598.45 522.13,1590.58 522.13,1563.34 491.14,1532.36 491.14,1518.21 476.14,1503.21 R52.2 ; *.D5 387.2,1733.26 *.D5@389.39,1731.07
Net*_D6: *.D6 P.6 R53.2 | length 404.9
  Top Layer w10: *.D6@431.5,1730.31 436.64,1730.31 437.4,1730.31 437.4,1703.81 495,1646.21 585,1646.21 630,1601.21 630,1598.45 624.63,1593.08 624.63,1560.84 582.5,1518.71 582.5,1518.21 567.5,1503.21 R53.2 ; *.D6 434.45,1733.26 *.D6@436.64,1731.07
NetR9_2: R9.2 U.4 | length 73.2
  Top Layer w10: R9.2 99.41,492.62 U.4
PHY_LED0: K.23 R59.2 U.1 | length 684.7
  Top Layer w10: U.1 150.59,709.8 R59.2 152,718.71 167,733.71 182.14,733.71 348.56,900.13 495.12,1046.69 K.23
PHY_RX_N: CN.6 K.3 | length 345.7
  Top Layer w8: K.3 686,1000.57 686,928.39 749.52,864.87 749.52,809.84 725.77,786.09 685.88,786.09 681.19,790.78 681.19,797.4 CN.6
PHY_RX_P: CN.3 K.4 | length 473
  Top Layer w8: CN.3 611.84,778.05 668.46,778.05 678.42,768.09 733.22,768.09 767.52,802.39 767.52,872.32 704,935.84 704,1000.57 K.4
PHY_TX_N: CN.2 K.5 | length 450.7
  Top Layer w8: K.5 724.9,1001.04 724.9,983.81 727.53,981.18 727.53,980.81 742.76,965.58 767.92,965.58 768.27,965.93 778.81,965.93 783.5,961.25 783.5,951.9 770,938.4 v1(770,936.21)
  Bottom Layer w15: CN.2 550.02,866.23 736.85,866.23 778.12,907.5 778.12,924.03 770,932.15 v1(770,936.21)
PHY_TX_P: CN.1 K.6 | length 594.2
  Top Layer w8: K.6 745.53,1000.09 745.53,988.27 750.21,983.58 760.46,983.58 760.82,983.93 786.27,983.93 801.5,968.7 801.5,951.9 815,938.4 v1(815,936.21)
  Bottom Layer w15: CN.1 519.9,786.11 726.49,786.11 750.02,809.64 750.02,844.04 803.12,897.14 803.12,920.28 815,932.15 v1(815,936.21)
RedLED: *.A7 D2.1 | length 217.1
  Top Layer w10: *.A7@648.03,2047.24 *.A7 645.08,2044.28 647.27,2042.09 654.84,2034.52 656.69,2034.52 675,2016.21 731.21,1960 807.21,1960 D2.1
REXT: K.9 R60.2 | length 125.1
  Top Layer w10: K.9 855.34,1066.37 878,1043.71 R60.2
RJ_45_GND: C57.1 C58.1 CN.8 R74.2 | length 243
  Bottom Layer w10: CN.8 C57.1 ; C58.1 C57.1 ; R74.2 C57.1
RMII_MDC: *.C15 C.1 R47.2 | length 2072.1
  Top Layer w10: v1(50,1665) 50,1886.21 56.57,1892.79 66.42,1892.79 72.51,1898.89 *.C15@72.51,1901.84 ; *.C15@73.99,1900.36 76.18,1902.55 *.C15 ; C.1 1045,1306.21 1045,1241.21 1060,1226.21 R47.2
  Bottom Layer w10: v1(50,1665) 58.79,1665 160,1766.21 695,1766.21 755,1826.21 890,1826.21 918.79,1855 1081.21,1855 1100,1836.21 1100,1391.21 C.1@1015,1306.21
RMII_MDIO: *.C14 C.2 R46.2 | length 2212.1
  Top Layer w10: v1(45,1615) 25,1635 25,1901.21 63.82,1940.03 66.42,1940.03 73.55,1947.17 73.55,1949.38 76.18,1952.01 *.C14 ; R46.2 930,1238.21 C.2
  Bottom Layer w10: v1(45,1615) 181.21,1751.21 710,1751.21 765,1806.21 905,1806.21 938.79,1840 1066.21,1840 1080,1826.21 1080,1406.21 1045,1371.21 980,1371.21 C.2
RST_D7: *.D7 R8.2 | length 537.1
  Top Layer w10: *.D7 478.74,1730.93 478.74,1730.31 478.74,1697.47 505,1671.21 613.79,1671.21 v1(625,1660)
  Bottom Layer w10: R8.2 308,1683.71 338,1653.71 618.71,1653.71 v1(625,1660)
RXD0: K.13 R52.1 | length 426
  Top Layer w10: R52.1 490,1414.21 498.21,1414.21 526.21,1386.21 580,1386.21 744.21,1222 K.13
RXD1: K.12 R53.1 | length 395.1
  Top Layer w10: R53.1 567.5,1429.21 582.5,1414.21 769.8,1226.91 K.12
RXER: K.17 R56.1 | length 878.4
  Top Layer w10: v1@608.24,1200.04 v1(604.42,1196.21) 606.99,1193.64 634.42,1193.64 661.1,1166.96 661.1,1164.05 665.47,1159.68 K.17 K.17@665.16,1151.33
  Bottom Layer w10: R56.1 157,613.71 172,628.71 190.28,628.71 342.78,781.21 604.42,1042.85 v1(604.42,1196.21)
SWITCH0: *.A6 B2.1 R3.1 | length 891.4
  Top Layer w10: *.A6@647.99,2001.21 646.3,2001.21 *.A6 645.08,1997.04 654.84,1987.28 658.03,1987.28 710.31,1935 v1(720,1935) ; v1(758.02,2178.2) 852.89,2178.2 v1(915.91,2241.21) 1045,2112.12 B2.1
  Bottom Layer w10: v1(720,1935) 758.02,1973.02 v1(758.02,2178.2) ; v1@920.91,2241.21 964.5,2241.21 1032.5,2309.21 R3.1
SWITCH1: *.A8 B1.1 R4.1 | length 450.3
  Top Layer w10: *.A8@645.08,2091.53 *.A8 645.6,2095 648.02,2095 v1(695,2095) ; v1(715,2186.21) 741.18,2212.39 779.18,2212.39 805.68,2238.89 B1.1 816.39,2261.21 v1(880,2261.21)
  Bottom Layer w10: v1(695,2095) 695,2156.21 715,2176.21 v1(715,2186.21) ; v1(880,2261.21) 885,2261.21 919.64,2295.86 941.64,2295.86 R4.1
TXD0: K.20 R49.2 | length 627.2
  Top Layer w10: R49.2 175,1384.21 v1(175,1379.61) ; v1(265,1380) 539.26,1105.74 K.20
  Bottom Layer w10: v1(175,1379.61) 264.61,1379.61 v1(265,1380)
TXD1: K.21 R51.2 | length 590.1
  Top Layer w10: R51.2 215,1356.21 485,1086.21 620.04,1086.21 K.21
TXEN: K.19 R48.2 | length 468.3
  Top Layer w10: R48.2 300,1391.21 565.79,1125.43 K.19
UART_RXD: *.A13 H.5 | length 749.4
  Top Layer w10: *.A13 648.03,2330.7 648.03,2327.01 654.84,2320.2 691.01,2320.2 v1(735,2276.21) ; v1@830,1851.21 830,1730.27 H.5
  Bottom Layer w10: v1(735,2276.21) 830,2181.21 v1@830,1851.21
  other v1: 830,1856.21
UART_TXD: *.A11 H.4 | length 751.4
  Top Layer w10: *.A11 *.A11@648.03,2236.21 ; *.A11@647.82,2238.95 647.82,2238.24 647.93,2238.13 654.84,2231.21 v1(715,2231.21) ; v1(785,1856.21) 785,1716.21 H.4
  Bottom Layer w10: v1(715,2231.21) 718.83,2227.39 753.83,2227.39 785,2196.21 v1(785,1856.21)
VDD_1v2: C45.2 C47.2 K.1 | length 799.4
  Top Layer w10: v1(575,970) 578.79,970 610.2,1001.41 K.1 K.1@645.79,992.75
  Bottom Layer w10: C47.2 C45.2 157,528.71 252.72,624.43 252.72,643.93 575,966.21 v1(575,970)
VDDA_3.3: C43.2 C44.2 FL.2 K.2 | length 1065.8
  Top Layer w10: v1(630,950) 635,950 665.16,980.16 665.16,1001.09 K.2
  Bottom Layer w10: FL.2 228.96,262.9 C44.2 C43.2 160,377.57 267.72,485.29 267.72,636.99 519.46,888.73 557.52,888.73 618.79,950 v1(630,950)
VDDIO: C33.2 C42.2 K.14 | length 992.9
  Top Layer w10: v1(705,1221.21) 705,1217.84 724.53,1198.31 K.14
  Bottom Layer w10: C33.2 155,698.21 155,790.36 195.86,831.21 350.36,831.21 535,1015.86 535,1171.57 584.64,1221.21 v1(705,1221.21)
X0: C1.1 K.7 Y.3 | length 569.9
  Top Layer w10: K.7 778.46,1027 810.43,995.04 816.17,995.04 v1(820,991.21)
  Bottom Layer w10: v1(820,991.21) 825.41,991.21 835.41,981.21 1015.36,981.21 1097.5,1063.36 1097.5,1135.21 1067.5,1165.21 C1.1 ; Y.3 C1.1@1054.57,1157.79
X1: C2.1 K.8 Y.1 | length 204.4
  Top Layer w10: K.8 804.12,1046.69 814.59,1036.21 v1(820,1036.21)
  Bottom Layer w10: v1(820,1036.21) 823.83,1040.04 843.83,1040.04 865,1061.21 865,1086.21 C2.1 ; C2.1@883.43,1104.64 Y.1
pads on no net: *.A2 *.A5 *.A12 *.A14 *.A15 *.A16 *.A17 *.A18 *.B1 *.B2 *.B3 *.B4 *.B5 *.B6 *.B7 *.B8 *.C2 *.C5 *.C6 *.C8 *.C9 *.C10 *.C11 *.C12 *.C13 *.C16 *.C17 *.C18 *.TP1 *.TP2 *.TP3 *.TP4 *.TP5 *.TP6 *.TP7 *.TP8 *.TP9 *.TP10 *.TP11 *.TP12 CN.7 CN.11 CN.12 CN.None CN.S1 CN.S2

## Polygon pours and split planes (outlines as drawn)
3v3 on 3v3 (split plane): 1114.9,19.24 20.1,19.24 20.1,2651.12 1114.9,2651.12
GND on GND (split plane): 1114.9,19.24 20.1,19.24 20.1,1770 630,1770 630,2651.12 1114.9,2651.12

## Other copper
Top Layer:
  rectangle net GND: 170,1816.21 545,2516.21
GND (plane layer: these items are gaps in the copper):
  rectangle: 15,1770 630,2655

## Silkscreen, mask and mechanical layers (free items; w line width, h text height)
Mechanical 1:
  lines w10: 1129.14,2671.21 0,2671.21 0,0 1135,0 1135,2665 1130,2670

## Text inside footprints (layer, text, board x,y; h text height)
CN: Top Overlay "+" at 915,296.21 h73.82 r180; Top Overlay "-" at 790.38,255.49 h73.82 r180; Top Overlay "-" at 435,371.21 h73.82 r180; Top Overlay "+" at 405,236.21 h73.82 r180; Mechanical 4 "12" at 940.23,421.01 h73.82 r180; Mechanical 4 "11" at 805.37,365.8 h73.82 r180; Mechanical 4 "10" at 524.61,430.86 h73.82 r180; Mechanical 4 "9" at 389.53,365.82 h73.82 r180; Mechanical 4 "FRONT" at 697.68,222.82 h73.82 r180; Mechanical 4 "RIGHT" at 923.46,97.26 h73.82 r180; Mechanical 4 "LEFT" at 434.12,96.85 h73.82 r180; Mechanical 4 "2" at 484.48,812.19 h73.82 r180; Mechanical 4 "4" at 584.88,811.82 h73.82 r180; Mechanical 4 "6" at 685.29,812.93 h73.82 r180; Mechanical 4 "8" at 785.66,812.5 h73.82 r180; Mechanical 4 "7" at 735.34,711.82 h73.82 r180; Mechanical 4 "5" at 635,712.24 h73.82 r180; Mechanical 4 "3" at 534.72,711.69 h73.82 r180; Mechanical 4 "1" at 434.03,712.15 h73.82 r180; Mechanical 4 "12" at 940.23,421.01 h73.82 r180; Mechanical 4 "11" at 805.37,365.8 h73.82 r180; Mechanical 4 "10" at 524.61,430.86 h73.82 r180; Mechanical 4 "9" at 389.53,365.82 h73.82 r180; Mechanical 4 "FRONT" at 697.68,222.82 h73.82 r180; Mechanical 4 "RIGHT" at 923.46,97.26 h73.82 r180; Mechanical 4 "LEFT" at 434.12,96.85 h73.82 r180; Mechanical 4 "2" at 484.48,812.19 h73.82 r180; Mechanical 4 "4" at 584.88,811.82 h73.82 r180; Mechanical 4 "6" at 685.29,812.93 h73.82 r180; Mechanical 4 "8" at 785.66,812.5 h73.82 r180; Mechanical 4 "7" at 735.34,711.82 h73.82 r180; Mechanical 4 "5" at 635,712.24 h73.82 r180; Mechanical 4 "3" at 534.72,711.69 h73.82 r180; Mechanical 4 "1" at 434.03,712.15 h73.82 r180